# Altium PCB PCB1.PcbDoc
Units mil, origin at the board's own origin, x right, y up, seen from the top; angles counter-clockwise.
Board outline 3582.68 x 2300 mil, 2 copper layers (Top Layer, Bottom Layer), stack 24.028 mil thick; 32 components, 60 nets, 135 pads, 13 vias.
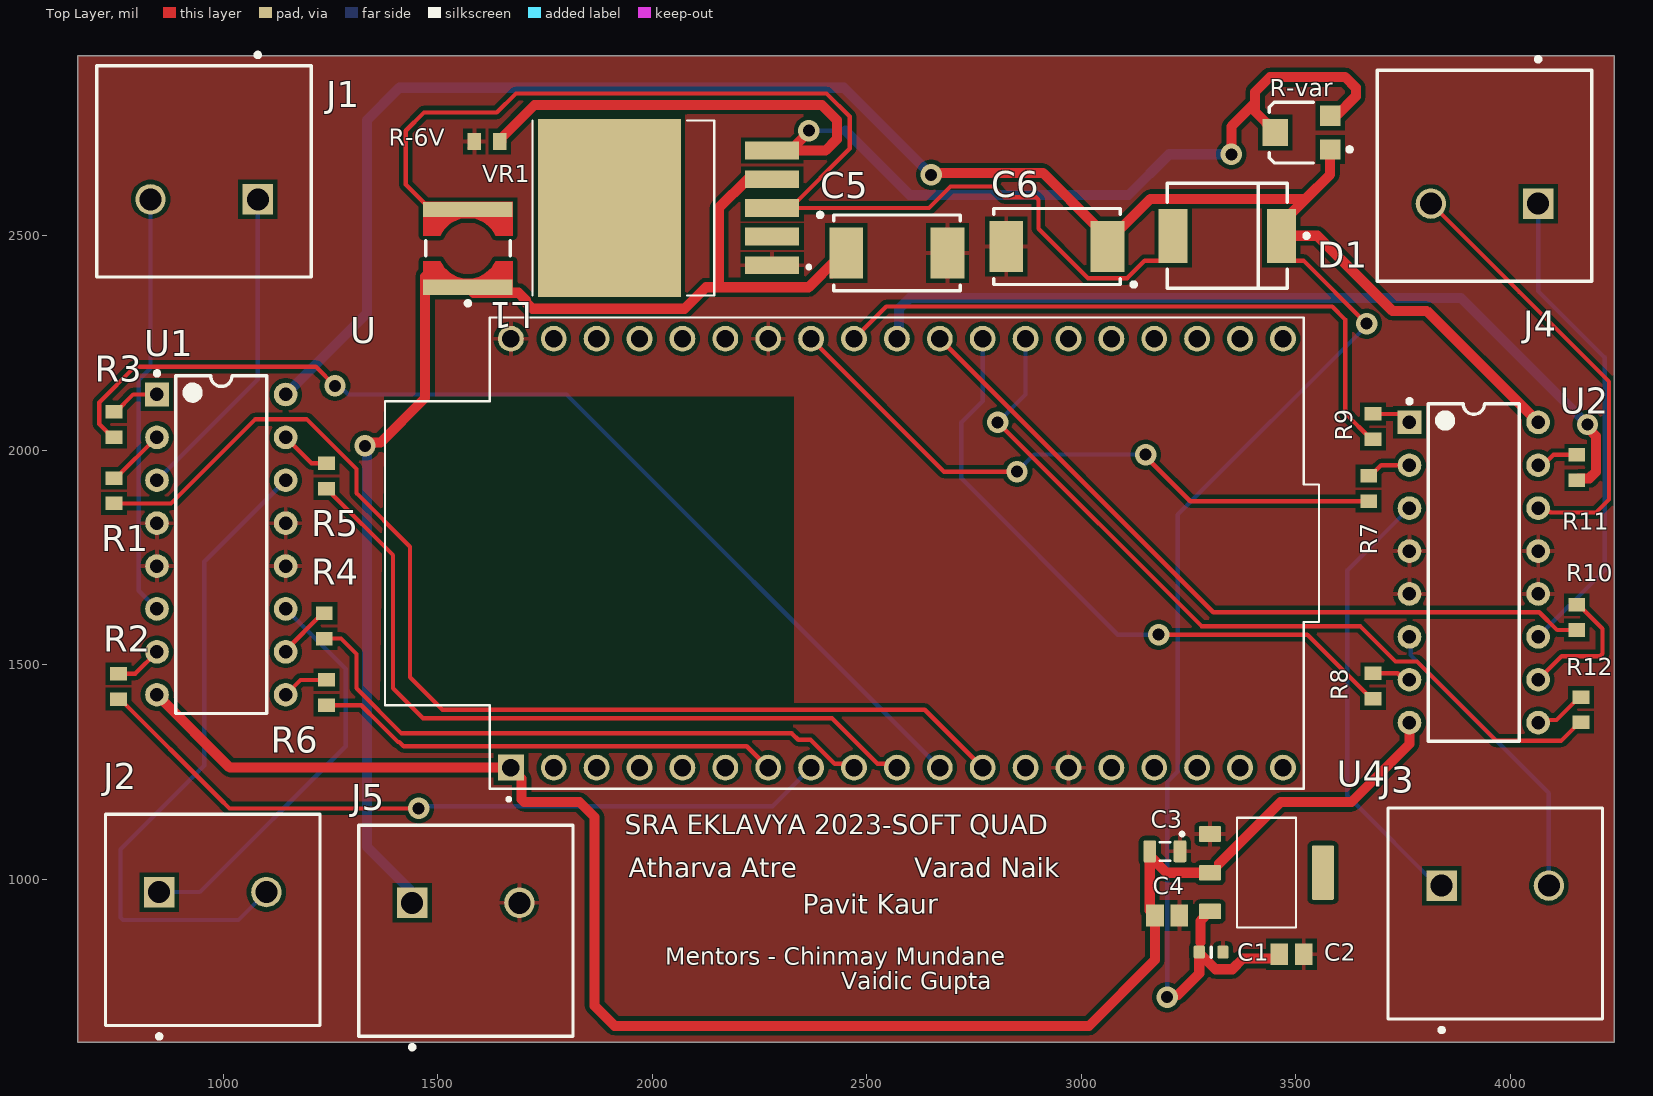
[diagram p0: Top Layer view]
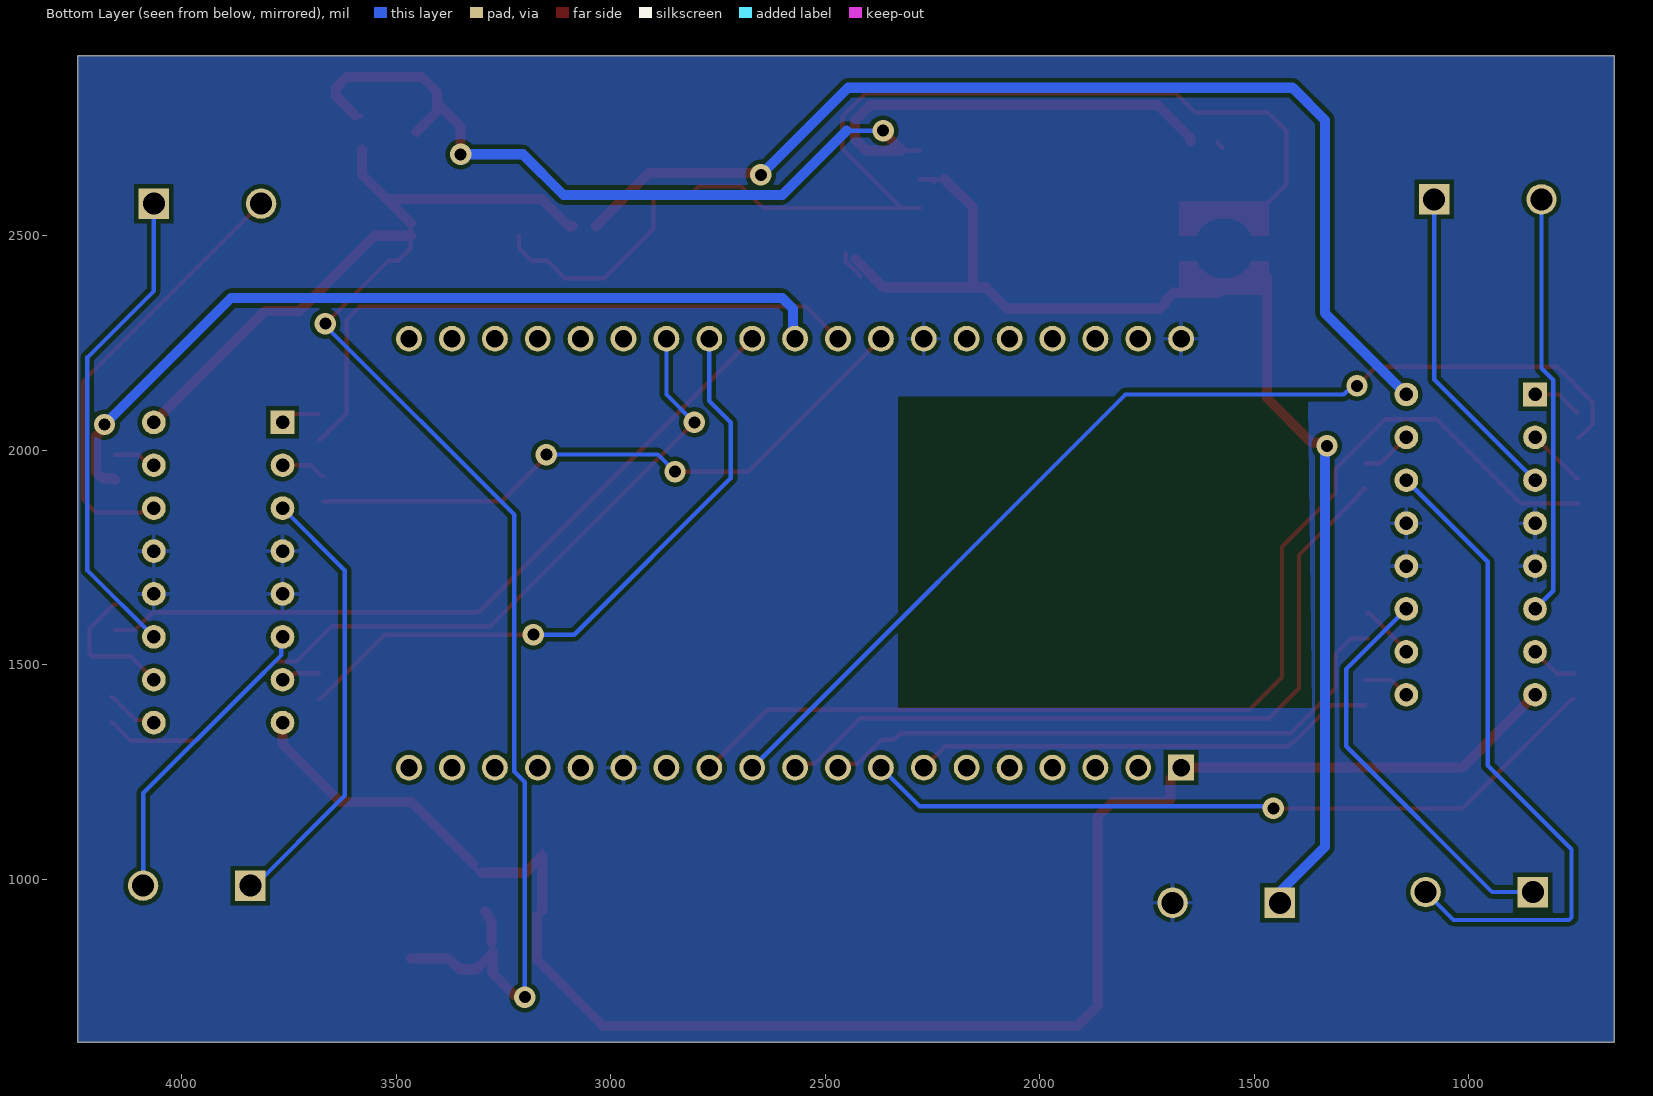
[diagram p1: Bottom Layer view, seen from below]
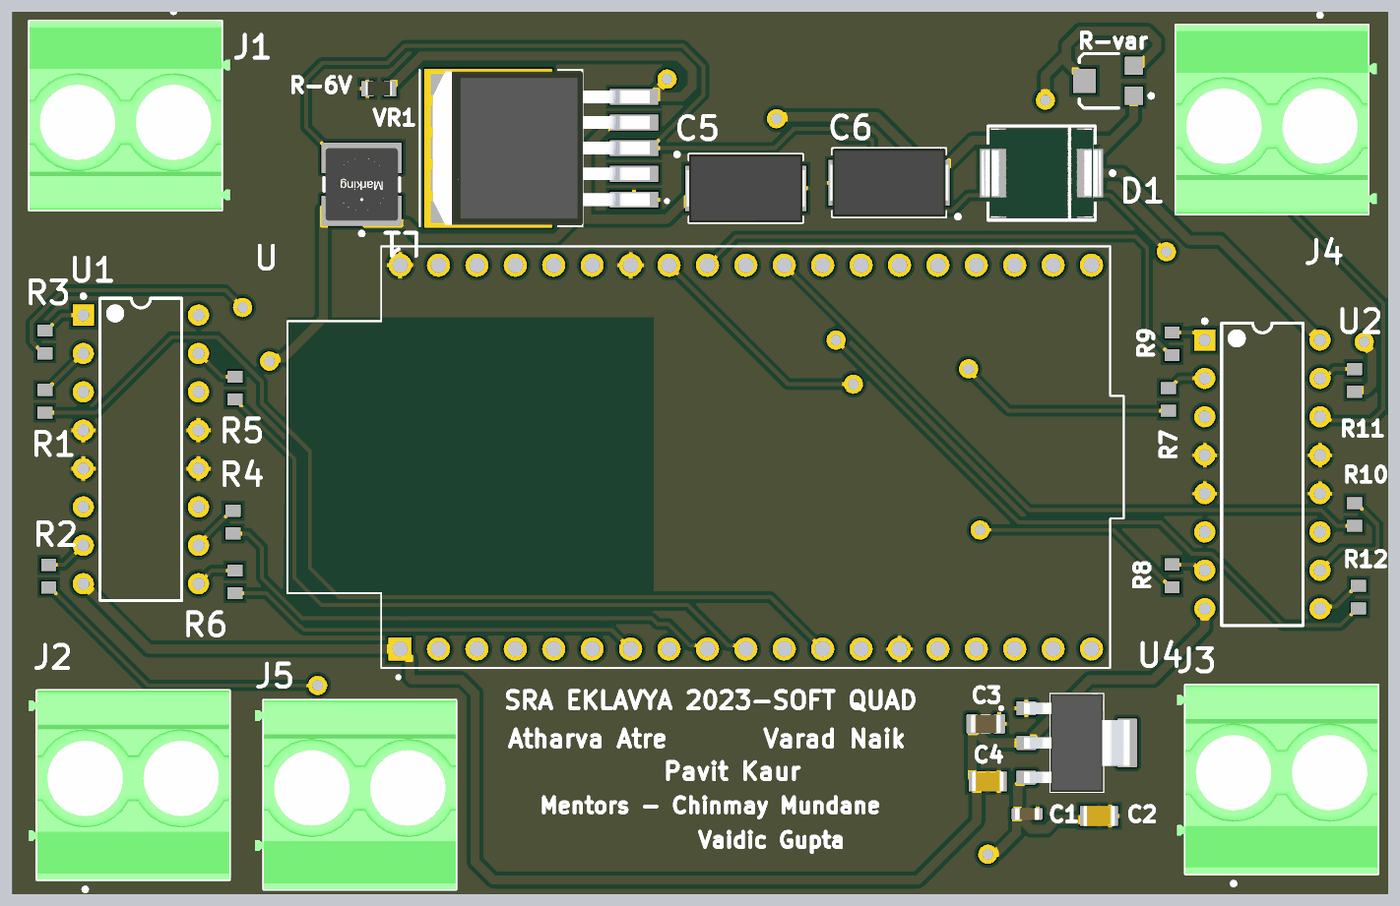
[diagram p2: 3D render of the assembled board from above, using the file's embedded part models]

## Layer stack, top to bottom
Stiffener 1: core 7.874, Core-009, Dk 4.5
Board Layer Stack Top Coverlay: solder mask 1.969, FC-001, Dk 4
Top Layer: signal copper 1.378
Adhesive 2: prepreg 0.512, PP-006, Dk 4.1
Dielectric 2: core 4.5, Core-012, Dk 4.5
Adhesive 1: prepreg 0.512, PP-006, Dk 4.1
Bottom Layer: signal copper 1.378
Board Layer Stack Bottom Coverlay: solder mask 1.969, FC-001, Dk 4
Stiffener 2: core 7.874, Core-009, Dk 4.5

## Board outline
1841.1,620 4242.68,620 4242.68,1188.7 4242.68,2920 3652.13,2920 660,2920 660,2369.8 660,620
board region "Layer Stack Region 4": 1362.64,2320 1362.64,1199.57 3567.36,1199.57 3567.36,2320
board region "Layer Stack Region 1": 660,620 1841.1,620 1841.1,1188.7 660,1188.7
board region 91mm: 3652.13,620 4242.68,620 4242.68,1188.7 3652.13,1188.7
board region "Layer Stack Region 3": 3652.13,2369.8 4242.68,2369.8 4242.68,2920 3652.13,2920
board region "Layer Stack Region 2": 660,2369.8 1250.55,2369.8 1250.55,2920 660,2920
board region "Layer Stack Region 5": 1841.1,620 3652.13,620 3652.13,1188.7 4242.68,1188.7 4242.68,2369.8 3652.13,2369.8 3652.13,2920 1250.55,2920 1250.55,2369.8 660,2369.8 660,1188.7 1841.1,1188.7

## Design rules (kind name [scope] priority, off if disabled: settings)
Clearance [All] p1: gap=10 ignorepadtopadclearanceinfootprint=FALSE except(0: Arc-Hole Track-Hole SMDPad-Hole THPad-Hole Via-Hole Fill-Hole Poly-Hole Region-Hole Text-Hole)
DiffPairsRouting [All] p1: maxlimit=10 minlimit=10 mostfreqgap=10 toplayer_minwidth=15 toplayer_maxwidth=15 toplayer_prefwidth=15 bottomlayer_minwidth=15 bottomlayer_maxwidth=15 bottomlayer_prefwidth=15 substack1={A8D2C1A1-517F-41F4-AAD3-1CD2C5E12471} toplayer_{a8d2c1a1-517f-41f4-aad3-1cd2c5e12471}_minwidth=15 toplayer_{a8d2c1a1-517f-41f4-aad3-1cd2c5e12471}_maxwidth=15 toplayer_{a8d2c1a1-517f-41f4-aad3-1cd2c5e12471}_prefwidth=15 bottomlayer_{a8d2c1a1-517f-41f4-aad3-1cd2c5e12471}_minwidth=15 bottomlayer_{a8d2c1a1-517f-41f4-aad3-1cd2c5e12471}_maxwidth=15 bottomlayer_{a8d2c1a1-517f-41f4-aad3-1cd2c5e12471}_prefwidth=15 maxuncoupledlength=500
PolygonConnect [All] p1: connectstyle=Relief reliefconductorwidth=10 reliefentries=4 polygonreliefangle="90 Angle" airgapwidth=10
RoutingVias [All] p1: holewidth=28 width=50 viastyle="Through Hole" minholewidth=28 minwidth=50 maxholewidth=28 maxwidth=50
SolderMaskExpansion [All] p1: expansion=4 istentingtop=FALSE
Width [All] p1: maxlimit=10 minlimit=10 preferedwidth=10 substack1={A8D2C1A1-517F-41F4-AAD3-1CD2C5E12471}
29 further rules are at their usual default settings.

## Components (designator, comment, footprint, x,y, rotation, side; value= is the part's Value field where it differs from the comment)
C1 "Capacitor 10µF +/-20% 10V 0603" CAPC0603(1608)100_L 3302.44,830 r0 top value=10µF
C2 "Capacitor 100 nF +/-10% 50 V 0805" CAPC2013X95X50LL10T25 3490,825 r0 top value=100nF
C3 "Capacitor 22µF +/-40% 16V 0805" CAPC0805(2012)145_L 3194.96,1065 r0 top value=22µF
C4 "Capacitor 100 nF +/-10% 50 V 0805" CAPC2013X95X50LL10T25 3200,915 r0 top value=100nF
C5 "TPSD227K010R0150" CAPMP7344X31-T_V 2570,2460 r0 top value=220µF
C6 "TPSD227K010R0150" CAPMP7344X31-T_V 2943.11,2475 r180 top value=220µF
D1 "SS34" FP-95402-MFG 3340,2500 r180 top
J1 "1714955" PHOE-1714955_V 955,2585 r180 top
J2 "1714955" PHOE-1714955_V 975,970 r0 top
J3 "1714955" PHOE-1714955_V 3965,985 r0 top
J4 "1714955" PHOE-1714955_V 3940,2575 r180 top
J5 "1714955" PHOE-1714955_V 1565,945 r0 top
L1 "330uH" WE-TPC_4818 1570,2470.55 r180 top
R1 "Resistor 1k +/-1% 0603 100 mW" RESC1608X55X25ML10T15 745,1905.47 r90 top value=1k
R2 "Resistor 1k +/-1% 0603 100 mW" RESC1608X55X25ML10T15 755,1449.53 r90 top
R3 "Resistor 1k +/-1% 0603 100 mW" RESC1608X55X25ML10T15 745,2060 r90 top value=1k
R4 "Resistor 1k +/-1% 0603 100 mW" RESC1608X55X25ML10T15 1235,1590.47 r90 top value=1k
R5 "Resistor 1k +/-1% 0603 100 mW" RESC1608X55X25ML10T15 1240,1940 r90 top value=1k
R6 "Resistor 1k +/-1% 0603 100 mW" RESC1608X55X25ML10T15 1240,1435 r90 top value=1k
R7 "Resistor 1k +/-1% 0603 100 mW" RESC1608X55X25ML10T15 3670,1910.47 r90 top value=1k
R8 "Resistor 1k +/-1% 0603 100 mW" RESC1608X55X25ML10T15 3680,1450.47 r90 top
R9 "Resistor 1k +/-1% 0603 100 mW" RESC1608X55X25ML10T15 3680,2055 r90 top value=1k
R10 "Resistor 1k +/-1% 0603 100 mW" RESC1608X55X25ML10T15 4155,1610.47 r90 top value=1k
R11 "Resistor 1k +/-1% 0603 100 mW" RESC1608X55X25ML10T15 4155,1960 r90 top value=1k
R12 "Resistor 1k +/-1% 0603 100 mW" RESC1608X55X25ML10T15 4165,1395 r90 top value=1k
R-6V "Resistor 1k +/-1% 0603 100 mW" RESC1608X55X25ML10T15 1614.53,2720 r180 top value=1k
R-var "TC33X-2-103E" BOUR-TC33X-2_V 3509.13,2740.63 r180 top
U "ESP32-DEVKITC" MODULE_ESP32-DEVKITC 2569.61,1760 r90 top
U1 "L293D" STM-L293D-16 995,1780 r0 top
U2 "L293D" STM-L293D-16 3915,1715 r0 top
U4 "AMS1117-3.3" SOT229P700X180-4N 3431.69,1015.16 r0 top
VR1 "XL6009" DPAK170P1435X465-6N 2037.8,2565 r180 top

## Footprints (in the part's own frame and the unit in brackets; to place one, negate y for a bottom-side part, rotate by r counter-clockwise, add the part's x,y. Pads: shape width x height; smd on the part's side, far side on the other; paste and mask are expansions set on the pad)
BOUR-TC33X-2_V [mm] "SMD, 3-Leads, Body 3.8x3.6mm"
  rect 1.2x1.2 smd: 1(-1.8,1) 3(-1.8,-1)
  rect 1.5x1.6 smd: 2(1.45,0)
  silkscreen extent -3.08,-1.8 1.8,1.8, body extent -2,-1.8 1.96,1.8, height 1.15
CAPC0603(1608)100_L [mm] "Chip Capacitor, Body 1.6x0.8mm, Height 1.0mm, IPC High Density"
  rrect25% 0.66x0.76 smd: 1(-0.7,0) 2(0.7,0)
  silkscreen extent 0,-0.3 0,0.3, body extent -0.8,-0.4 0.8,0.4, height 0.95
CAPC0805(2012)145_L [mm] "Chip Capacitor, Body 2.0x1.2mm, Height 1.45mm, IPC High Density"
  rrect25% 0.76x1.3 smd: 1(-0.9,0) 2(0.89,0)
  silkscreen extent -0.3,-0.55 0.3,0.55, body extent -1,-0.6 1,0.6, height 1.45
CAPC2013X95X50LL10T25 [mm] "Chip Capacitor, 2-Leads, Body 2.10x1.35mm, IPC High Density"
  rect 1.05x1.3 smd: 1(-0.725,0) 2(0.725,0)
  body extent -1.05,-0.67 1.05,0.67, height 0.95
CAPMP7344X31-T_V [mm] "Molded Capacitor, 2-Leads, Body 7.50x4.5mm"
  rect 2x3 smd: 1(-3,0) 2(3,0)
  silkscreen extent -4.67,-2.25 3.75,2.37, body extent -3.97,-2.25 3.97,2.25, height 3.1
DPAK170P1435X465-6N [mm]
  rect 3.21x1.05 smd: 1(-6.13,3.4) 2(-6.13,1.7) 3(-6.13,0) 4(-6.13,-1.7) 5(-6.13,-3.4)
  rect 8.46x10.53 smd paste-6: 6(3.5,0)
  silkscreen extent -8.4,-5.18 8.05,5.18, body extent -7.17,-5.08 7.17,5.08, height 4.65
FP-95402-MFG [mm]
  rect 1.72x3.2 smd paste+0 mask+0: 1(-3.205,0) 2(3.205,0)
  silkscreen extent -4.83,-3.11 3.55,3.11, body extent -4.17,-3.21 4.17,3.21, height 0.25
MODULE_ESP32-DEVKITC [mm]
  rect 1.53x1.53 hole 1.02: 1(-12.7,22.85)
  round 1.53 hole 1.02: 2(-12.7,20.31) 3(-12.7,17.77) 4(-12.7,15.23) 5(-12.7,12.69) 6(-12.7,10.15) 7(-12.7,7.61) 8(-12.7,5.07) 9(-12.7,2.53) 10(-12.7,-0.01) 11(-12.7,-2.55) 12(-12.7,-5.09) 13(-12.7,-7.63) 14(-12.7,-10.17) 15(-12.7,-12.71) 16(-12.7,-15.25) 17(-12.7,-17.79) 18(-12.7,-20.33) 19(-12.7,-22.87) 20(12.7,-22.87) 21(12.7,-20.33) 22(12.7,-17.79) 23(12.7,-15.25) 24(12.7,-12.71) 25(12.7,-10.17) 26(12.7,-7.63) 27(12.7,-5.09) 28(12.7,-2.55) 29(12.7,-0.01) 30(12.7,2.53) 31(12.7,5.07) 32(12.7,7.61) 33(12.7,10.15) 34(12.7,12.69) 35(12.7,15.23) 36(12.7,17.77) 37(12.7,20.31) 38(12.7,22.85)
  silkscreen extent -14.67,-25 13.95,30.3
PHOE-1714955_V [mm] "Terminal Block, 2-Leads, Body 12.7x12.5mm, Pitch 6.35mm"
  rect 1.8x1.8 hole 1.3: 1(-3.175,0)
  round 1.8 hole 1.3: 2(3.175,0)
  silkscreen extent -6.35,-8.67 6.35,4.6, body extent -6.92,-7.9 6.35,4.6, height 21.51
RESC1608X55X25ML10T15 [mm] "Chip Resistor, 2-Leads, Body 1.70x0.90mm, IPC Low Density"
  rect 0.8x1 smd: 1(-0.75,0) 2(0.75,0)
  body extent -0.85,-0.45 0.85,0.45, height 0.55
SOT229P700X180-4N [mm]
  rrect15% 1.31x0.93 smd: 1(-3.345,2.29) 2(-3.345,0) 3(-3.345,-2.29)
  rrect15% 1.31x3.24 smd: 4(3.345,0)
  silkscreen extent -5.1,-3.25 1.75,3.25, body extent -3.5,-3.25 3.5,3.25, height 1.8
STM-L293D-16 [mm] "DIP, 16-Leads, Body 20x6.85mm, Pitch 2.54mm"
  rect 1.4x1.4 hole 0.8: 1(-3.81,8.89)
  round 1.4 hole 0.8: 2(-3.81,6.35) 3(-3.81,3.81) 4(-3.81,1.27) 5(-3.81,-1.27) 6(-3.81,-3.81) 7(-3.81,-6.35) 8(-3.81,-8.89) 9(3.81,-8.89) 10(3.81,-6.35) 11(3.81,-3.81) 12(3.81,-1.27) 13(3.81,1.27) 14(3.81,3.81) 15(3.81,6.35) 16(3.81,8.89)
  silkscreen extent -3.93,-10 2.7,10.26, body extent -3.93,-10 3.93,10, height 5.1
WE-TPC_4818 [mm] "Power Inductor, SMD, 2-Leads, body 4.8x4.8mm"
  rect 5.3x0.9 smd paste-403.566 mask-403.566: 1(0,2.3) 2(0,-2.3)
  Top Layer region: 2.65,-0.75 1.636,-0.75 1.636,-0.75 1.138,-1.394 0.407,-1.753 -0.407,-1.753 -1.138,-1.394 -1.636,-0.75 -1.636,-0.75 -2.65,-0.75 -2.65,-0.75 -2.65,-2.75 2.65,-2.75
  Top Layer region: -2.65,0.75 -1.636,0.75 -1.636,0.75 -1.138,1.394 -0.407,1.753 0.407,1.753 1.138,1.394 1.636,0.75 1.636,0.75 2.65,0.75 2.65,0.75 2.65,2.75 -2.65,2.75
  silkscreen extent -2.5,-0.45 2.5,3.37, body extent -2.4,-2.4 2.4,2.4, height 1.8

## Part data
C1: library part CMP-001-00075-4, "Chip Capacitor, 10µF +/-20%, 10V, 0603, Thickness 1 mm", Tolerance=10%, Voltage Rating=10V, Case/Package=0603, Min Operating Temperature=-55°C, Max Operating Temperature=85°C, Mounting Technology=SMT, Pins=2
C2 C4: library part CMP-001-00018-6, "Chip Capacitor, 100 nF, +/- 10%, 50 V, 0805 (2012 Metric)", Capacitor Type=Ceramic, Case/Package=0805, Max Operating Temperature=125°C, Min Operating Temperature=-55°C, Tolerance=10%, Voltage Rating=50V, Mounting Technology=SM, Pins=2, RoHS Compliant=True
C3: library part CMP-001-00081-4, "Chip Capacitor, 22µF +/-40%, 16V, 0805, Thickness 1.45 mm", Tolerance=5%, Voltage Rating=16V, Case/Package=0805, Min Operating Temperature=-55°C, Max Operating Temperature=85°C, Pins=2, Mounting Technology=SMT
C5 C6: library part CMP-001-00051-7, "Tantalum Capacitor, 220 uF, +/- 10%, 10 V, -55 to 125 degC, 2917 (7343 Metric), RoHS, Tape and Reel", Package Reference=7343-31, Package Description="2-Pin Surface Mount Device, Body 7.3 x 4.35 mm", Package Quantity=1, Tolerance=10%, Case/Package=2917, Voltage Rating=10V, Capacitor Type=Tantalum, Max Operating Temperature=125°C, Min Operating Temperature=-55°C, Manufacturer="AVX Corporation", Packaging=TapeandReel, Pins=2, RoHS Compliant=True, Mounting Technology=SM, Datasheet URL=https://datasheet.ciiva.com/8080/1680477-8080379.pdf, Datasheet Version=42736, Manufacturer URL=http://www.avx.com/
D1: library part CMP-02539-000012-1, "DIODE SCHOTTKY 40V 3A DO214AB", Max Surge Forward Current=100A, Max Junction Temp=+150°C, Max Repetitive Reverse Voltage=40V, Manufacturer=Vishay, Manufacturer Part Number=SS34-E3/57T, Temperature="-55°C to +150°C", Package=95402, Peak Reverse Current=0.5mA, Temperature Range Low=-55°C, Forward Current=3A, Lead Free=Yes, Mouser Description="Schottky Diodes & Rectifiers 3.0 Amp 40 Volt", RoHS=TRUE, Standoff Height=0mm, Octopart=https://octopart.com/ss34-e3%2F57t-vishay-39552907, Height=2.62mm, Category=Diode, ComponentLink2Description=Datasheet, ComponentLink2URL=http://www.vishay.com/docs/88751/ss32.pdf, Temperature Range High=+150°C, Automotive=No, Digikey Description="DIODE SCHOTTKY 40V 3A DO214AB", Footprint Url=http://www.vishay.com/docs/95402/smc.pdf, Device Class L1="Discrete Semiconductors", Device Class L2=Diodes, Device Class L3="Schottky Diodes"
J1 J2 J3 J4 J5: library part CMP-2000-05797-1, "PC Terminal Block, Pitch 6.35 mm, 1 x 2 Position, Height 21.5 mm, Tail Lenght 5.1 mm, RoHS, Bulk", Manufacturer="Phoenix Contact", Package Description="PC Terminal Block, Pitch 6.35 mm, 1 x 2 Position, Height 21.5 mm, Tail Lenght 5.1 mm", Manufacturer URL=http://www.phoenixcontact.com/, Mounting Technology=ThroughHole, Package Reference=1714955, Datasheet URL=http://media.digikey.com/pdf/Data%20Sheets/Phoenix%20Contact%20PDFs/1714955.pdf, Datasheet Version=02/2010
L1: library part CMP-1479-00039-3, Max DC Current=150mA, Min Operating Temperature=-40°C, Max Operating Temperature=125°C, Test Frequency=100kHz, Tolerance=30%, Self Resonant Frequency=5.5MHz, Saturation Current=130mA, Case Code (Metric)=4848, Case/Package=1919, Ambient Temperature Range High=95°C, Inductance=330µH, DC Resistance (DCR)=4.1Ω, Mount="Surface Mount", Packaging=Digi-Reel®, Number of Pins=2, NexarPartId=24533131, Length=4.8mm, REACH SVHC=Unknown, Termination=SMD/SMT, Shielding=Shielded, RoHS=Compliant, RMS Current (Irms)=150mA, Composition=Wirewound, Width=4.8mm, Case Code (Imperial)=1919, Ambient Temperature Range Low=-40°C, Core Material=Ferrite, Inductance Tolerance=30%, Lead Free="Lead Free", Height - Seated (Max)=2.0066mm, Current Rating=150mA, Height=1.8mm
R1 R2 R3 R4 R5 R6 R7 R8 R9 R10 R11 R12 R-6V: library part CMP-009-00014-5, "Chip Resistor, 1 KOhm, +/-1%, 0.1 W, -55 to 155 degC, 0603 (1608 Metric)", Power=100mW, Tolerance=1%, Case/Package=0603, Voltage Rating=50V, Min Operating Temperature=-55°C, Max Operating Temperature=155°C, Pins=2, RoHS Compliant=True, Mounting Technology=SM
R-var: library part CMP-009-00060-2, "Trimming Potentiometer, 10000 Ohm, -40 to 100 degC, 3-Pin SMD, RoHS, Tape and Reel", Package Reference=TC33X-2, Package Description="3-Pin Surface Mount Device, Body 3.8 x 3.6 mm", Package Quantity=2500, Tolerance=25%, Power=100mW, Resistance=10k, Max Operating Temperature=120°C, Min Operating Temperature=-40°C, Manufacturer=Bourns, Packaging=TapeandReel, RoHS Compliant=True, Mounting Technology=SM, Composition=Potentiometer, Datasheet URL=http://www.bourns.com/docs/Product-Datasheets/TC33.pdf, Case/Package=TC33X-2, Datasheet Version=Aug-16, Manufacturer URL=http://www.bourns.com/
U: "- Transceiver; 802.11 b/g/n _Wi-Fi, WiFi, WLAN_, BluetoothÂ® Smart Ready 4.x Dual Mode For Use With ESP-WROOM-32", Package=None, Availability=Unavailable, MF="Espressif Systems", MP=ESP32-DEVKITC-32D-F, Price=None, SnapEDA_Link=https://www.snapeda.com/parts/ESP32-DEVKITC-32D-F/Espressif%20Systems/view-part/4220172/?ref=snap
U1 U2: library part CMP-2000-06524-1, "Push-Pull Four Channel Driver with Diode, 4.5 to 36 V, -40 to 150 degC, 16-Pin PDIP, RoHS, Tube", Package / Case="16-DIP(0.300\",7.62mm)", Package Description="16-Pin Thru-Hole Dual-In-Line, Body 20 x 6.85 mm, Pitch 2.54 mm", On-State Resistance=-, Operating Temperature=-40°C~150°C, Standard Package=25, Supplier Device Package=16-PowerDIP, Package Reference=DIP-16, Current - Peak Output=1.2A, Voltage - Supply=4.5V~36V, Current - Output / Channel=600mA, Manufacturer=STMicroelectronics, Other Related Documents=L293DViewAllSpecifications, Other Names=497-2936-5, Number of Outputs=4, Type=HalfBridge, Series=-, Packaging=Tube, PartNumber=L293D, Datasheet URL=http://www.st.com/st-web-ui/static/active/en/resource/technical/document/datasheet/CD00000059.pdf, Datasheet Version=07/2003, Category=IntegratedCircuits(ICs), Dynamic Catalog=HalfBridge, Manufacturer URL=http://www.st.com/, Mounting Technology=ThroughHole, Mounting Type=ThroughHole, Family=PMIC-MOSFET,BridgeDrivers-InternalSwitch, Input Type=Non-Inverting
U4: "Sot223/Pkg 1-Amp 3.3-Volt Low Drop Out Voltage Regulatator", Package="SOT-223 Seeed Technology", Availability="Not in stock", Check_prices=https://www.snapeda.com/parts/AMS1117-3.3/Advanced+Monolithic+Systems/view-part/?ref=eda, MF="Advanced Monolithic Systems", MP=AMS1117-3.3, Price=None, SnapEDA_Link=https://www.snapeda.com/parts/AMS1117-3.3/Advanced+Monolithic+Systems/view-part/?ref=snap
VR1: library part CMP-003-000000-1, "The XL6009 regulator is a wide input range, current mode, DC/DC converter which is capable of generating either positive or negative output voltages.", Package="TO-263-5L XLSEMI", Pin Count=6, MP=XL6009, SnapEDA_Link=https://www.snapeda.com/parts/XL6009/XLSEMI/view-part/?ref=snap, Source=XL6009.SchLib, Price=None, MF=XLSEMI, Availability="Not in stock", Check_prices=https://www.snapeda.com/parts/XL6009/XLSEMI/view-part/?ref=eda, Design Item ID=XL6009, Component Type=Standard

## Via types
v1: diameter 50, hole 28, Top Layer to Bottom Layer, 13 vias

## Nets (pads, with @x,y where several pads share a name; then routed paths per layer and width w, separated by ;. In a path a pad name is that pad's centre, name@x,y a point inside that pad or via, vN(x,y) a via of type N, cw(c..) or ccw(c..) an arc to the next point about the centre after c; other vN are vias at no path point)
3V3: C3.1 C4.1 U1.8 U2.8 U4.2 U.1 | length 4057.8
  Top Layer w10: U.1 U.1@1695.12,1234.88 ; 1695.12,1185.86 1700.98,1180 ; C4.1@3159.53,926.93 C4.1 ; C3.1@3159.53,1054.37 C3.1 ; U4.2 3307.48,1015.16 3320.79,1028.46 3320.79,1035.94 ; U2.8@3758.45,1365 U2.8@3765,1358.45
  Top Layer w23.62: U1.8 1015,1260 U.1 ; 1695.12,1185.86 U.1@1695.12,1234.88 ; 1700.98,1180 1830,1180 1865,1145 1865,705 1912.07,657.93 3017.93,657.93 3171.46,811.46 C4.1 ; C4.1@3159.53,926.93 3159.53,1054.37 3198.74,1015.16 U4.2 ; 3320.79,1035.94 3464.84,1180 3630,1180 3765,1315 U2.8@3765,1358.45
4: R12.1 U.26 | length 1907.3
  Top Layer w10: v1(2805,2065) 3280,1590 3650,1590 3732.44,1507.56 3782.63,1507.56 3967.75,1322.44 4118.03,1322.44 4161.06,1365.47 R12.1
  Bottom Layer w10: v1(2805,2065) 2870,2130 U.26
5: R11.1 U.29 | length 1981
  Top Layer w23.62: R11.1 4158.94,1934.41 4184.41,1934.41 4200,1950 4200,2032.97 4180,2052.97 v1(4180,2060)
  Bottom Layer w10: U.29 U.29@2574.86,2264.86
  Bottom Layer w23.62: U.29@2574.86,2264.86 2574.86,2320 2574.86,2329.86 2600,2355 3885,2355 v1(4180,2060)
14: R1.1 U.12 | length 2654.1
  Top Layer w10: R1.1 877.76,1875.94 1074.37,2072.56 1193.61,2072.56 1310,1956.17 1310,1900 1435,1775 1435,1470.86 1510.86,1395 2635,1395 U.12
16: R8.1 U.27 | length 1518.6
  Top Layer w10: v1(3180,1570) 3527.01,1570 3676.06,1420.94 R8.1
  Bottom Layer w10: U.27 2770,2115 2720,2065 2720,1935 3085,1570 v1(3180,1570)
17: R10.1 U.28 | length 1766.3
  Top Layer w10: U.28 3307.56,1622.44 4067.75,1622.44 4109.24,1580.94 R10.1
18: R9.1 U.30 | length 1497.3
  Top Layer w10: U.30 2545,2335 3585,2335 3615,2305 3615,2086.54 3676.06,2025.47 R9.1
19: R7.1 U.31 | length 1481
  Top Layer w10: U.31 2680,1950 v1(2850,1950) ; v1@3155,1980 3254.06,1880.94 R7.1
  Bottom Layer w10: v1(2850,1950) 2890,1990 v1(3150,1990)
25: R4.1 U.9 | length 1406.5
  Top Layer w10: R4.1 1274.06,1560.94 1310,1525 1310,1445 1415,1340 2325,1340 2340,1325 2368.81,1325 2424.88,1268.92 2461.08,1268.92 U.9
26: R5.1 U.10 | length 1783.6
  Top Layer w10: R5.1 1243.94,1910.47 1254.69,1899.72 1254.69,1895.79 1395,1755.47 1395,1445 1465,1375 2418.81,1375 2524.88,1268.92 2561.08,1268.92 U.10
27: R3.1 U.11 | length 2479.3
  Top Layer w10: R3.1 741.06,2030.47 710.31,2061.22 710.31,2111.49 793.83,2195 1215,2195 v1(1260,2150)
  Bottom Layer w10: v1(1260,2150) 1270.82,2150 1290.82,2130 1800,2130 U.11
32: R6.1 U.7 | length 1102.9
  Top Layer w10: R6.1 1321.24,1405.47 1362.64,1364.08 1406.72,1320 1410,1320 1420,1310 2220,1310 U.7
  Bottom Layer w10: U.7@2261.08,1268.92 U.7
33: R2.1 U.8 | length 1760
  Top Layer w10: R2.1 758.94,1420 990.24,1188.7 1013.94,1165 v1(1455,1165)
  Bottom Layer w10: v1(1455,1165) 1460,1170 1841.1,1170 2280,1170 2309.57,1199.57 U.8
+3.7: C5.1 J5.1 L1.1 VR1.4 | length 2950.2
  Top Layer w10: v1(1330,2010) v1@1337.65,2017.65 ; 1362.64,2017.65 1365.94,2017.65 ; 1470,2405 1485,2420 ; L1.1@1479.19,2375.81 1479.19,2384.19 1495,2400 ; L1.1 L1.1@1582.72,2367.28 ; VR1.4@2221.93,2631.93 VR1.4@2251.93,2631.93 ; VR1.4@2245,2625 VR1.4@2251.93,2631.93 ; VR1.4 VR1.4@2251.93,2631.93 ; C5.1@2417.52,2405.94 2451.89,2440.32 C5.1
  Top Layer w23.62: v1@1337.65,2017.65 1362.64,2017.65 ; 1365.94,2017.65 1470,2121.72 1470,2405 ; L1.1@1582.72,2367.28 1687.72,2367.28 1705,2350 1705,2345.24 1720.24,2330 2075,2330 2125,2380 2364.25,2380 C5.1@2429.25,2445 ; 2155,2385 2155,2565 VR1.4@2221.93,2631.93
  Bottom Layer w23.62: v1@1335,2014.91 1335,1075 J5.1@1440,970
+6: C1.1 C2.1 C6.1 D1.1 R-var.1 U1.16 U2.16 U4.3 | length 6628.4
  Top Layer w10: v1(2650,2641.81) 2661.81,2641.81 v1@2666.48,2646.48 ; 3152.58,2586.04 3161.04,2586.04 ; C1.1 3274.88,849.2 ; U4.3@3280.45,911.69 3286.02,917.26 3293.76,925 U4.3 ; D1.1@3466.18,2529.13 D1.1 3466.18,2470.87 3495.04,2442.01 3517.99,2442.01 v1(3665,2295)
  Top Layer w23.62: v1@2666.48,2646.48 2910.9,2646.48 3033.66,2523.72 C6.1@3033.66,2522.24 ; C6.1@3088.78,2522.24 3097.24,2522.24 3161.04,2586.04 3523.09,2586.04 ; v1(3200,725) 3205.05,730.05 3224.81,730.05 3274.88,780.12 C1.1 ; C1.1@3276.07,826.85 3312.92,790 3351.82,790 3376.82,815 C2.1@3465,815 ; 3277.87,852.18 3277.87,902.87 3286.02,911.02 3286.02,917.26 3286.02,918.5 3292.52,925 U4.3@3293.76,925 ; D1.1 3550,2500 3725,2325 3805,2325 U2.16 ; D1.1@3466.18,2529.13 3523.09,2586.04 ; R-var.1 3580,2642.95 3523.09,2586.04
  Bottom Layer w10: v1(3200,725) 3200,1226.19 3224.88,1251.08 3224.88,1849.88 v1@3665,2290
  Bottom Layer w23.62: U1.16 1335,2320 1335,2770 1410,2845 2446.81,2845 v1(2650,2641.81)
GND: C1.2 C2.2 C3.2 C4.2 C5.2 C6.2 J5.2 R-6V.2 U1.4 U1.5 U1.12 U1.13 U2.4 U2.5 U2.12 U2.13 U4.1 U.14 U.32 U.38 VR1.1 | length 19.1
  Top Layer w10: R-6V.2@1574.25,2705.31 1585,2716.06 R-6V.2
NetD1_2: D1.2 L1.2 VR1.3 | length 2799.9
  Top Layer w10: L1.2 1483.39,2561.1 1425,2619.49 1425,2745 1467.28,2787.28 1637.28,2787.28 1681.81,2831.81 2406.11,2831.81 2460,2777.92 2460,2703.35 VR1.3@2321.65,2565 ; VR1.3 VR1.3@2321.65,2565 ; D1.2 3213.82,2470.87 3184.96,2442.01 3147.87,2442.01 3106.8,2400.94 3015.64,2400.94 2900,2516.58 2900,2584.14 2894.14,2590 2820,2590 2795,2615 2695,2615 2645,2565 VR1.3@2321.65,2565
NetJE1_1: U.19
NetJE1_2: U.18
NetJE1_3: U.17
NetJE1_4: U.16
NetJE1_5: U.15
NetJE1_7: U.13
NetJE1_14: U.6
NetJE1_15: U.5
NetJE1_16: U.4
NetJE1_17: U.3
NetJE1_18: U.2
NetJE2_2: U.37
NetJE2_3: U.36
NetJE2_4: U.35
NetJE2_5: U.34
NetJE2_6: U.33
NetJE2_14: U.25
NetJE2_15: U.24
NetJE2_16: U.23
NetJE2_17: U.22
NetJE2_18: U.21
NetJE2_19: U.20 | length 7.1
  Top Layer w10: U.20 U.20@3475,2255
NetR1_2: R1.2 U1.2 | length 139.4
  Top Layer w10: R1.2 748.94,1935 843.94,2030 U1.2
NetR2_2: R2.2 U1.7 | length 111.1
  Top Layer w10: R2.2 794.06,1479.06 U1.7
NetR3_2: R3.2 U1.1 | length 116.8
  Top Layer w10: R3.2 748.94,2089.53 789.41,2130 U1.1
NetR4_2: R4.2 U1.10 | length 129.6
  Top Layer w10: U1.10 1145,1533.94 1231.06,1620 R4.2
NetR5_2: R5.2 U1.15 | length 120
  Top Layer w10: U1.15 1205.47,1969.53 R5.2
NetR6_2: R6.2 U1.9 | length 109.3
  Top Layer w10: U1.9 1179.53,1464.53 R6.2
NetR7_2: R7.2 U2.2 | length 105.4
  Top Layer w10: R7.2 3673.94,1940 3698.94,1965 U2.2
NetR8_2: R8.2 U2.7 | length 91.2
  Top Layer w10: R8.2 3737.79,1480 3752.79,1465 U2.7
NetR9_2: R9.2 U2.1 | length 93.1
  Top Layer w10: R9.2 3745.47,2084.53 U2.1
NetR10_2: R10.2 U2.10 | length 316.5
  Top Layer w10: U2.10 4120,1520 4209.14,1520 4215,1525.86 4215,1583.94 4158.94,1640 R10.2
NetR11_2: R11.2 U2.15 | length 100.2
  Top Layer w10: U2.15 4076.13,1965 4100.66,1989.53 R11.2
NetR12_2: R12.2 U2.9 | length 124.7
  Top Layer w10: U2.9 4071.02,1371.02 4107.56,1371.02 4161.06,1424.53 R12.2
NetR-6V_1: R-6V.1 R-var.2 R-var.3 VR1.5 | length 2802.8
  Top Layer w10: R-6V.1 R-6V.1@1647.99,2720 ; VR1.5 VR1.5@2321.65,2698.86 ; 3405,2789.65 3405,2795 ; R-var.2 R-var.2@3452.05,2742.6 ; R-var.3 R-var.3@3595,2780
  Top Layer w23.62: R-6V.1@1647.99,2720 1647.99,2727.87 1725.12,2805 2395,2805 2430,2770 2430,2725 2403.86,2698.86 2321.65,2698.86 v1@2360,2737.2 ; v1(3350,2690) 3350,2755 3405,2810 ; 3405,2789.65 R-var.2@3452.05,2742.6 ; 3405,2795 3405,2810 ; R-var.3@3595,2780 3640,2825 3640,2845 3615,2870 3440,2870 3405,2835 3405,2810
  Bottom Layer w10: v1(2365,2745) 2450,2745
  Bottom Layer w23.62: 2450,2745 2600,2595 3110,2595 3205,2690 v1(3350,2690)
OUT1A: J1.1 U1.3 | length 752.3
  Bottom Layer w10: U1.3 1080,2165 J1.1
OUT1B: J1.2 U1.6 | length 984
  Bottom Layer w10: J1.2 830,2191.33 802.44,2163.77 802.44,1672.56 U1.6
OUT2A: J2.1 U1.11 | length 953.8
  Bottom Layer w10: J2.1 945,970 1285,1310 1285,1490 U1.11
OUT2B: J2.2 U1.14 | length 1548
  Bottom Layer w10: J2.2 1035,905 765.86,905 760,910.86 760,1070 955,1265 955,1740 U1.14
OUT3A: J3.1 U2.3 | length 1041.2
  Bottom Layer w10: U2.3 3620,1720 3620,1195 J3.1@3840,975
OUT3B: J3.2 U2.6 | length 724.6
  Bottom Layer w10: U2.6 3767.75,1562.25 3767.75,1522.44 3845.09,1445.09 4090,1200.19 J3.2@4090,975
OUT4A: J4.1 U2.11 | length 1138.4
  Bottom Layer w10: U2.11 4220,1720 4220,2216.5 4065,2371.5 J4.1
OUT4B: J4.2 U2.14 | length 1043.5
  Top Layer w10: J4.2 4020.2,2369.8 4230,2160 4230,1885 4200,1855 4093.42,1855 4092.05,1856.37 4073.63,1856.37 U2.14
pads on no net: U4.4 VR1.2 VR1.6

## Polygon pours and split planes (outlines as drawn)
GND on Top Layer "GND_L01_P001" (solid, pour order 1): 1841.1,620 4242.68,620 4242.68,1188.7 4242.68,2920 3652.13,2920 660,2920 660,2369.8 660,620
GND on Bottom Layer "GND_L02_P002" (solid, pour order 2): 1841.1,620 4242.68,620 4242.68,1188.7 4242.68,2920 3652.13,2920 660,2920 660,2369.8 660,620
no net on Layer0 "Default Coverlay 2 Top" (split plane): 1841.1,620 3652.13,620 3652.13,1188.7 4242.68,1188.7 4242.68,2369.8 3652.13,2369.8 3652.13,2920 1250.55,2920 1250.55,2369.8 660,2369.8 660,1188.7 1841.1,1188.7
no net on Layer0 "Default Coverlay 2 Bottom" (split plane): 1841.1,620 3652.13,620 3652.13,1188.7 4242.68,1188.7 4242.68,2369.8 3652.13,2369.8 3652.13,2920 1250.55,2920 1250.55,2369.8 660,2369.8 660,1188.7 1841.1,1188.7
no net on Layer0 "Default Coverlay 1 Top" (split plane): 1362.64,2320 1362.64,1199.57 3567.36,1199.57 3567.36,2320
no net on Layer0 "Default Coverlay 1 Top" (split plane): 660,620 1841.1,620 1841.1,1188.7 660,1188.7
no net on Layer0 "Default Coverlay 1 Top" (split plane): 3652.13,620 4242.68,620 4242.68,1188.7 3652.13,1188.7
no net on Layer0 "Default Coverlay 1 Top" (split plane): 3652.13,2369.8 4242.68,2369.8 4242.68,2920 3652.13,2920
no net on Layer0 "Default Coverlay 1 Top" (split plane): 660,2369.8 1250.55,2369.8 1250.55,2920 660,2920
no net on Layer0 "Default Coverlay 1 Bottom" (split plane): 1362.64,2320 1362.64,1199.57 3567.36,1199.57 3567.36,2320
no net on Layer0 "Default Coverlay 1 Bottom" (split plane): 660,620 1841.1,620 1841.1,1188.7 660,1188.7
no net on Layer0 "Default Coverlay 1 Bottom" (split plane): 3652.13,620 4242.68,620 4242.68,1188.7 3652.13,1188.7
no net on Layer0 "Default Coverlay 1 Bottom" (split plane): 3652.13,2369.8 4242.68,2369.8 4242.68,2920 3652.13,2920
no net on Layer0 "Default Coverlay 1 Bottom" (split plane): 660,2369.8 1250.55,2369.8 1250.55,2920 660,2920

## Other copper
Multi-Layer:
  pour cut-out: 1375,2125 2330,2125 2330,1400 2320,1400 2310,1400 1365,1400

## Silkscreen, mask and mechanical layers (free items; w line width, h text height)
Top Overlay:
  text "SRA EKLAVYA 2023-SOFT QUAD" at 1935,1105 h45
  text "Atharva Atre" at 1945,1005 h45
  text "Varad Naik" at 2610,1005 h45
  text "Pavit Kaur" at 2350,920 h45
  text "Mentors - Chinmay Mundane" at 2030,800 h40
  text "Vaidic Gupta" at 2440,743.33 h40